# EAGLE board Raspberry Pi (EAGLE 6.6.0)

Size 65 x 56 mm. Coordinates in mm from the lower left corner, seen from the top.
Copper layers (1*16): Top 0.035mm / dielectric 1.5mm / Bottom 0.035mm
Design rules "default": minimum track width 10mil, minimum drill 24mil, track to track 8mil, track to pad 8mil, pad to pad 8mil, via to via 8mil, smd to smd 8mil, copper to edge 40mil, drill to drill 8mil, minimum pad ring 10mil, minimum via ring 8mil, stop-mask expansion 4mil, vias tented up to drill 0mil, thermal gap 10mil

## Footprints (pad centres in the part's own frame; a part is rotated, then mirrored left to right if it is on the bottom)
PI_HAT_RAW = drill 1.016 pad 1.524 octagon: 0 41.39,51.23; 1 41.39,53.77; 2 10.95,51.23; 3 13.45,51.23; 3V3. 28.69,51.23; 4 15.99,51.23; 5 43.93,51.23; 5V 8.41,53.77; 5V. 10.95,53.77; 6 46.47,51.23; 7 38.85,53.77; 8 36.31,53.77; 9 33.77,51.23; 10 31.23,51.23; 11 36.31,51.23; 12 46.47,53.77; 13 49.01,51.23; 14 15.99,53.77; 15 18.53,53.77; 16 51.55,53.77; 17 21.07,51.23; 18 21.07,53.77; 19 51.55,51.23; 20 54.048,53.77; 21 56.59,53.77; 22 26.15,51.23; 23 26.15,53.77; 24 28.69,53.77; 25 33.77,53.77; 26 54.048,51.23; 27 23.61,51.23; GND 56.59,51.23; GND. 49.01,53.77; GND.@1 43.93,53.77; GND.@2 38.85,51.23; GND.@3 31.23,53.77; GND.@4 23.61,53.77; GND.@5 18.53,51.23; GND.@6 13.45,53.77 | smd 0.635 x 1.27: 0@1 41.378,48.748; 1@1 42.648,48.748; 2@1 10.898,48.748; 3.3V@1 8.358,48.748; 3.3V@2 28.678,48.748; 3@1 13.438,48.748; 4@1 15.978,48.748; 5@1 43.918,48.748; 5V@1 9.628,48.748; 5V@2 12.168,48.748; 6@1 46.458,48.748; 7@1 40.108,48.748; 8@1 37.568,48.748; 9@1 33.758,48.748; 10@1 31.218,48.748; 11@1 36.298,48.748; 12@1 47.728,48.748; 13@1 48.998,48.748; 14@1 17.248,48.748; 15@1 19.788,48.748; 16@1 52.808,48.748; 17@1 21.058,48.748; 18@1 22.328,48.748; 19@1 51.538,48.748; 20@1 55.348,48.748; 21@1 57.888,48.748; 22@1 26.138,48.748; 23@1 27.408,48.748; 24@1 29.948,48.748; 25@1 35.028,48.748; 26@1 54.078,48.748; 27@1 23.598,48.748; GND@1 14.708,48.748; GND@2 18.518,48.748; GND@3 24.868,48.748; GND@4 32.488,48.748; GND@5 38.838,48.748; GND@6 45.188,48.748; GND@7 50.268,48.748; GND@8 56.618,48.748 | smd 0.635 x 1.27 bottom: 0@2 41.378,48.748; 1@2 42.648,48.748; 2@2 10.898,48.748; 3.3V@3 8.358,48.748; 3.3V@4 28.678,48.748; 3@2 13.438,48.748; 4@2 15.978,48.748; 5@2 43.918,48.748; 5V@3 9.628,48.748; 5V@4 12.168,48.748; 6@2 46.458,48.748; 7@2 40.108,48.748; 8@2 37.568,48.748; 9@2 33.758,48.748; 10@2 31.218,48.748; 11@2 36.298,48.748; 12@2 47.728,48.748; 13@2 48.998,48.748; 14@2 17.248,48.748; 15@2 19.788,48.748; 16@2 52.808,48.748; 17@2 21.058,48.748; 18@2 22.328,48.748; 19@2 51.538,48.748; 20@2 55.348,48.748; 21@2 57.888,48.748; 22@2 26.138,48.748; 23@2 27.408,48.748; 24@2 29.948,48.748; 25@2 35.028,48.748; 26@2 54.078,48.748; 27@2 23.598,48.748; GND@9 14.708,48.748; GND@10 18.518,48.748; GND@11 24.868,48.748; GND@12 32.488,48.748; GND@13 38.838,48.748; GND@14 45.188,48.748; GND@15 50.268,48.748; GND@16 56.618,48.748 | drill 1.016 pad 1.524 square: 3V3 8.41,51.23 | hole 2.75: 3.5,3.5; 61.5,3.5; 61.5,52.5; 3.5,52.5

## Placement (x,y rotation side)
E$2  [PI_HAT_RAW]  0,0 0 top

## Library data of the parts
E$2 = voltera_EAGLE_community_lib